# Altium PCB ISL6236A PCB.PcbDoc
Units mm, origin at the board's own origin, x right, y up, seen from the top; angles counter-clockwise.
Board outline 50 x 50 mm, 6 copper layers (L1 [Top Layer], L2 [GND], L3 [Int 1], L4 [Int 2], L5 [GND], L6 [Bottom Layer]), stack 0.215 mm thick; 41 components, 27 nets, 119 pads, 69 vias.
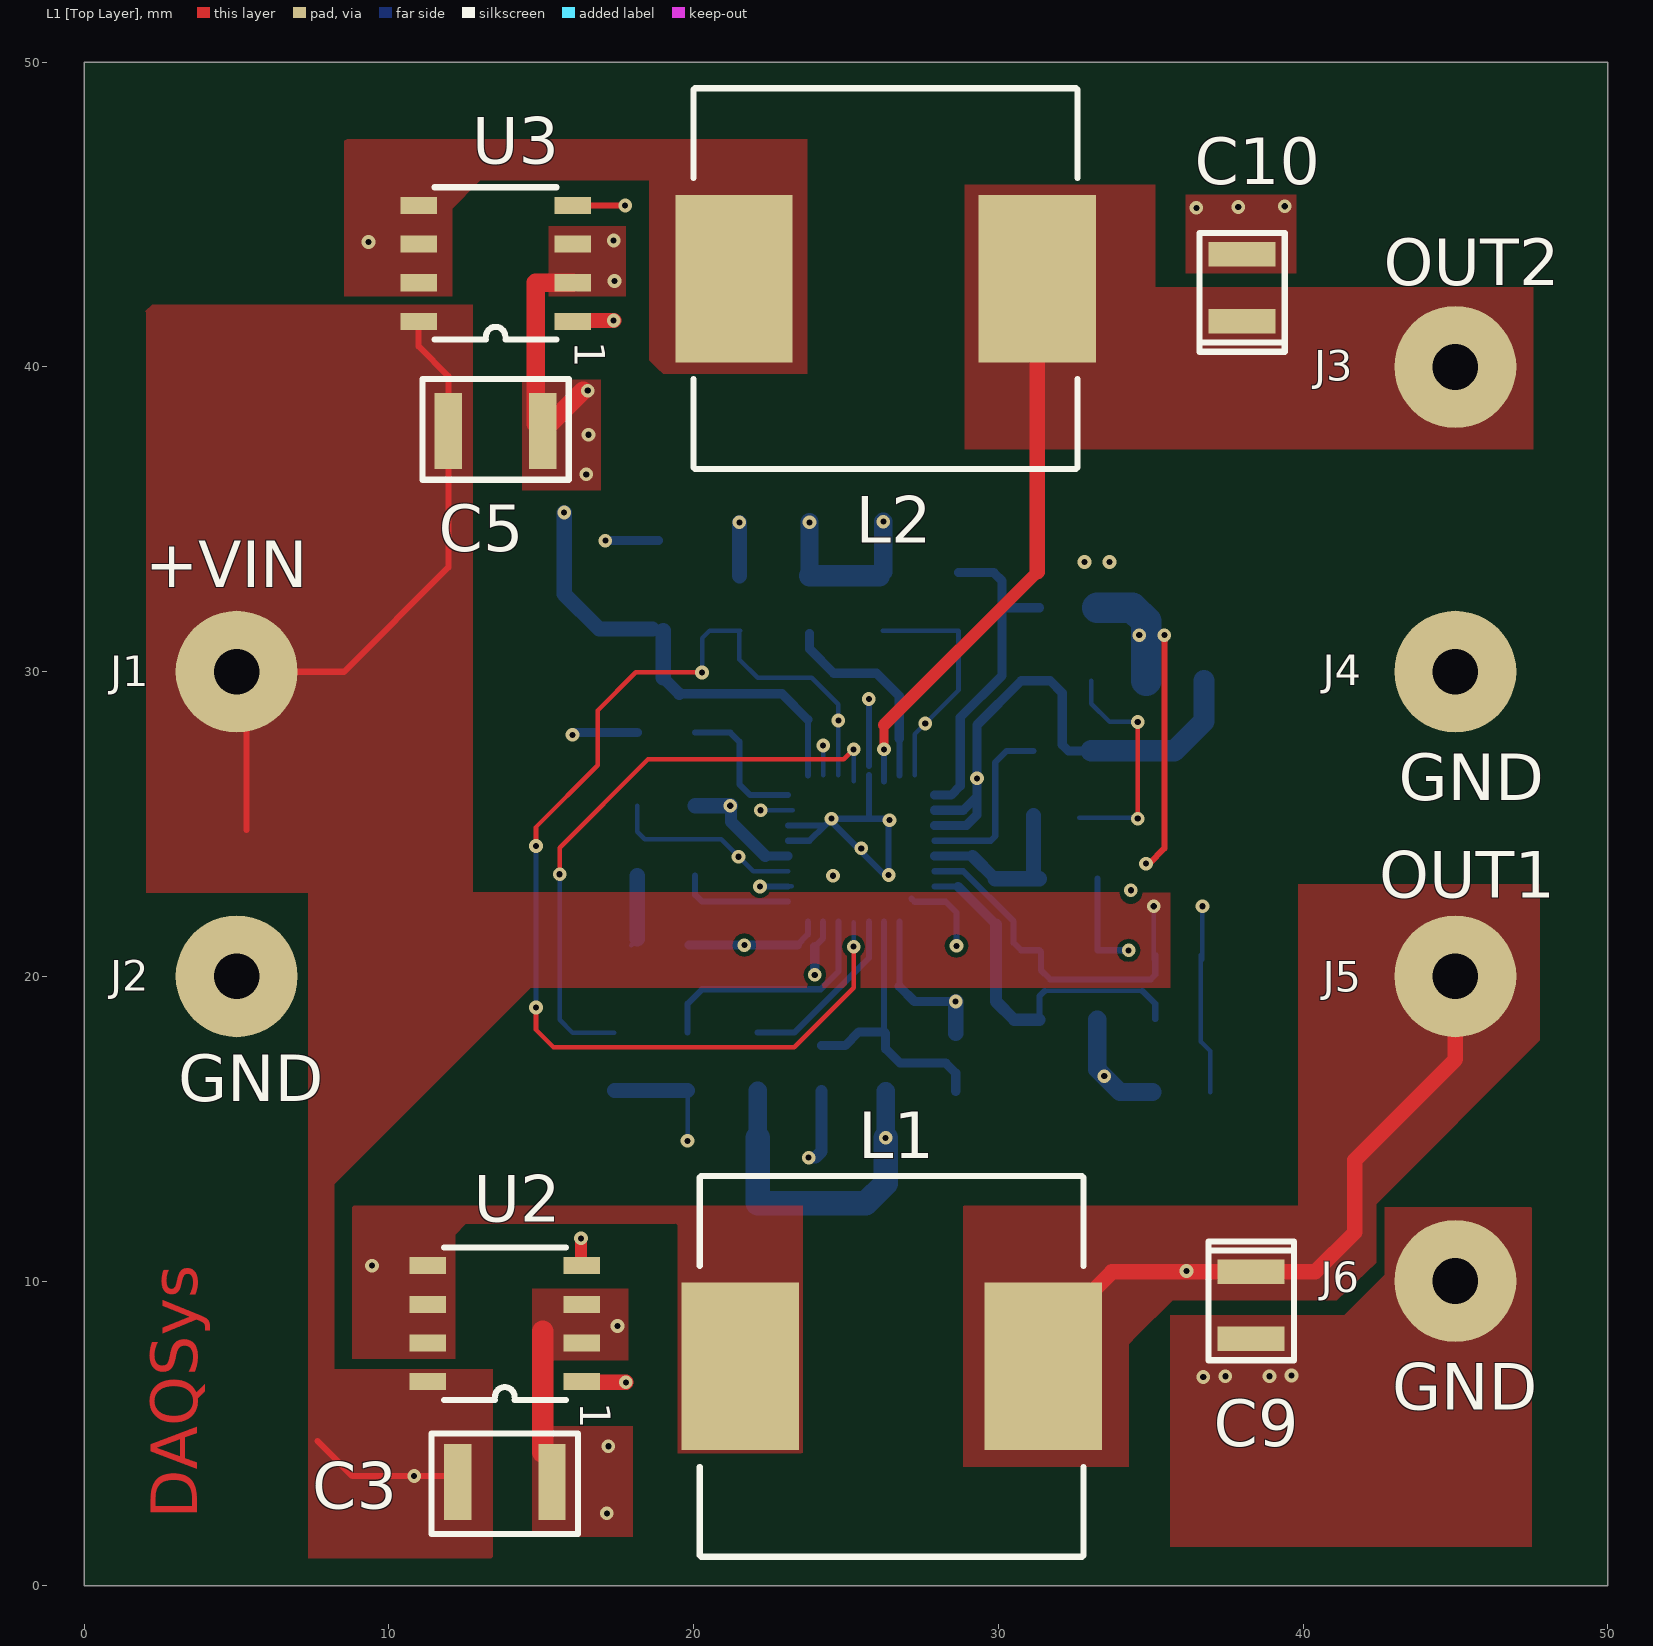
[diagram p0: L1 [Top Layer] view]
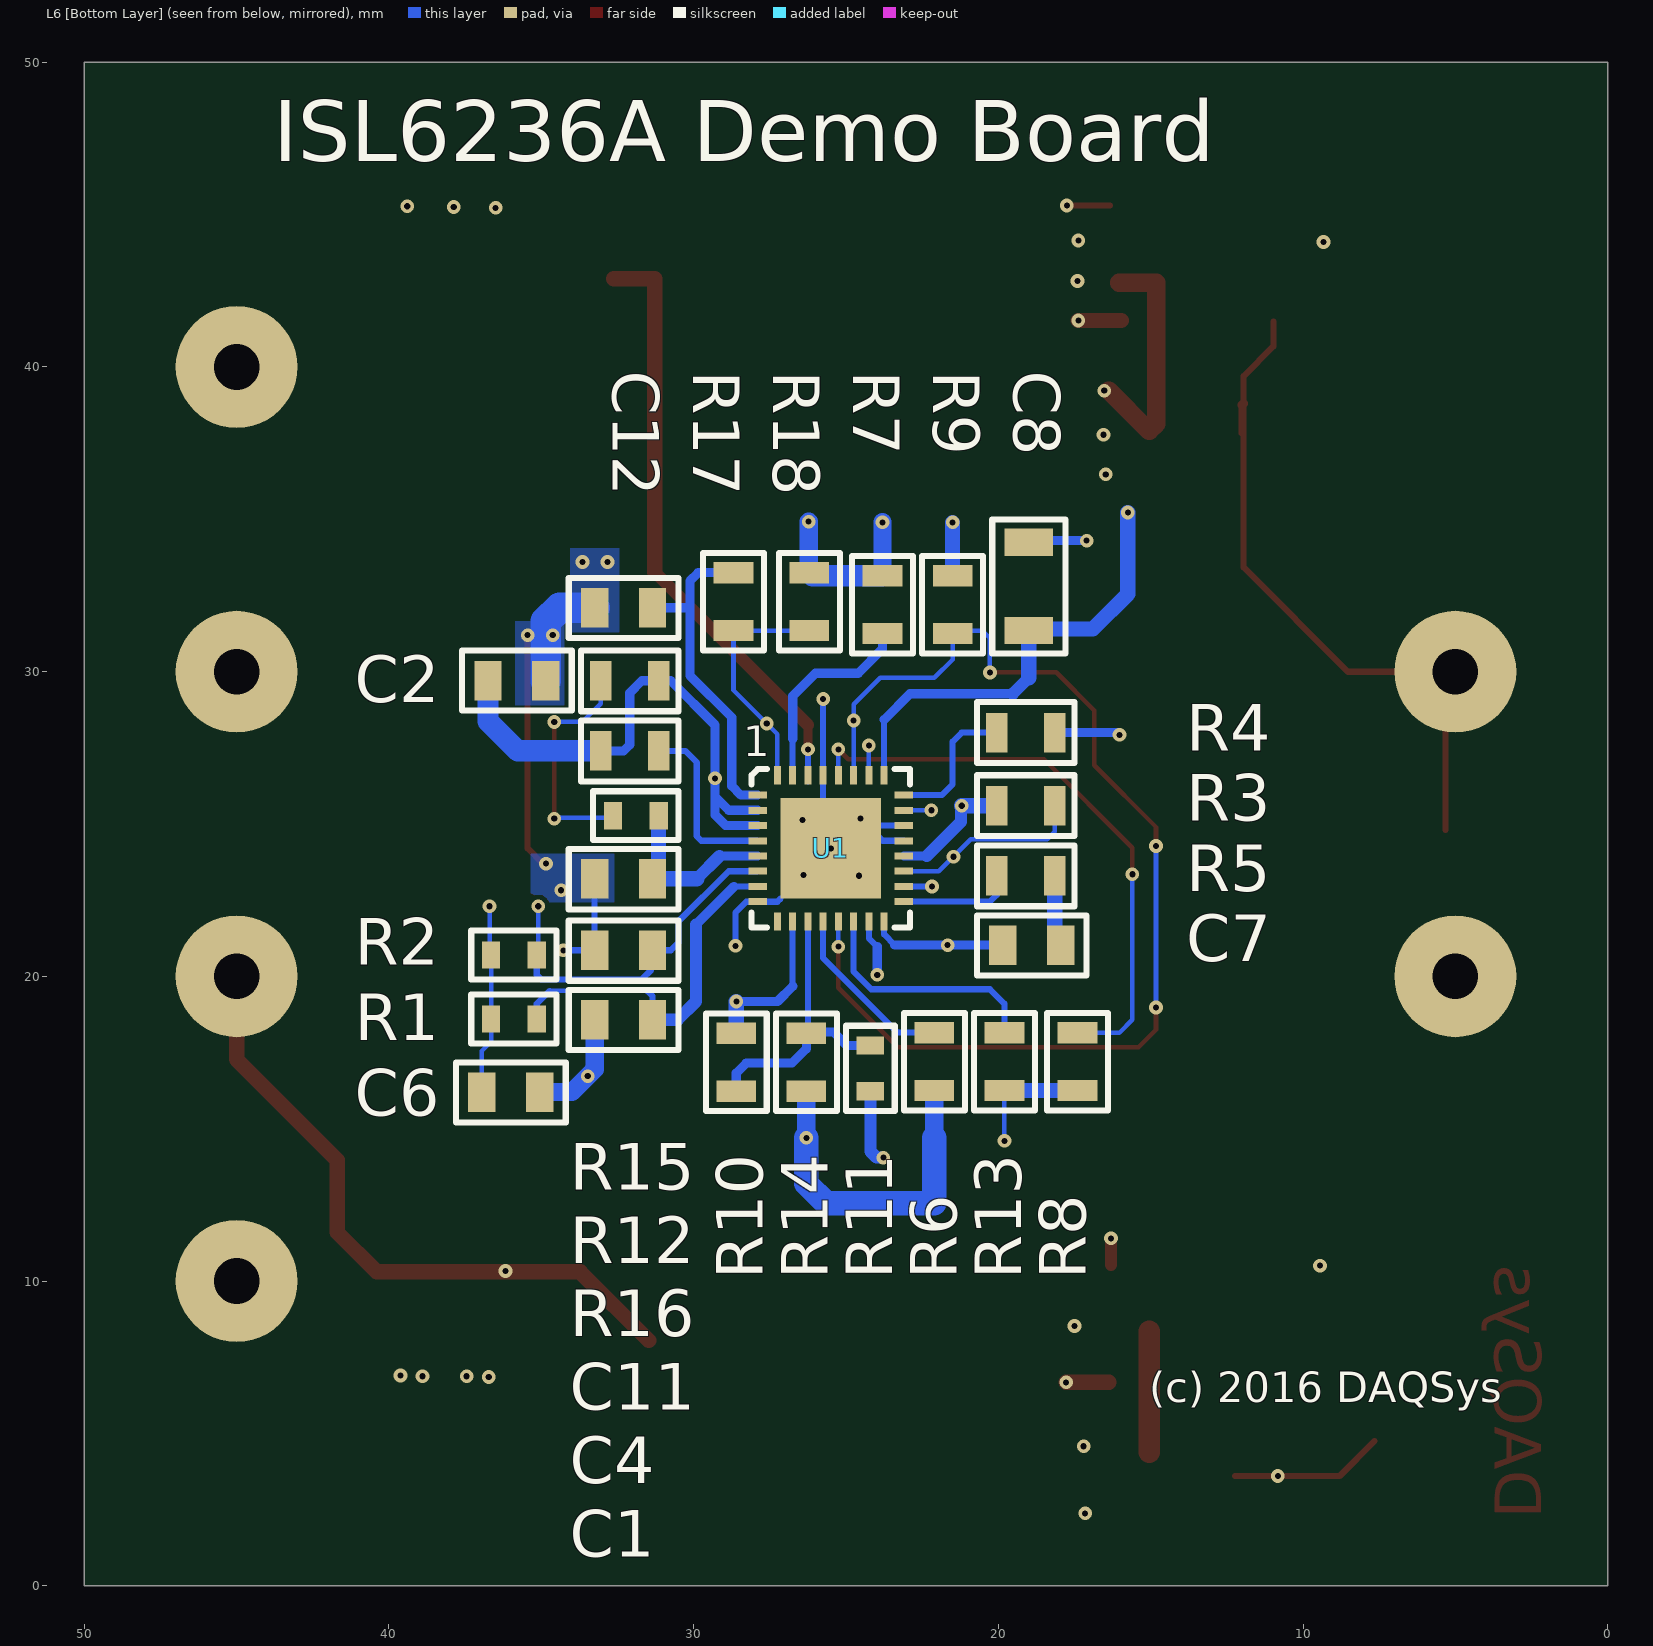
[diagram p1: L6 [Bottom Layer] view, seen from below]
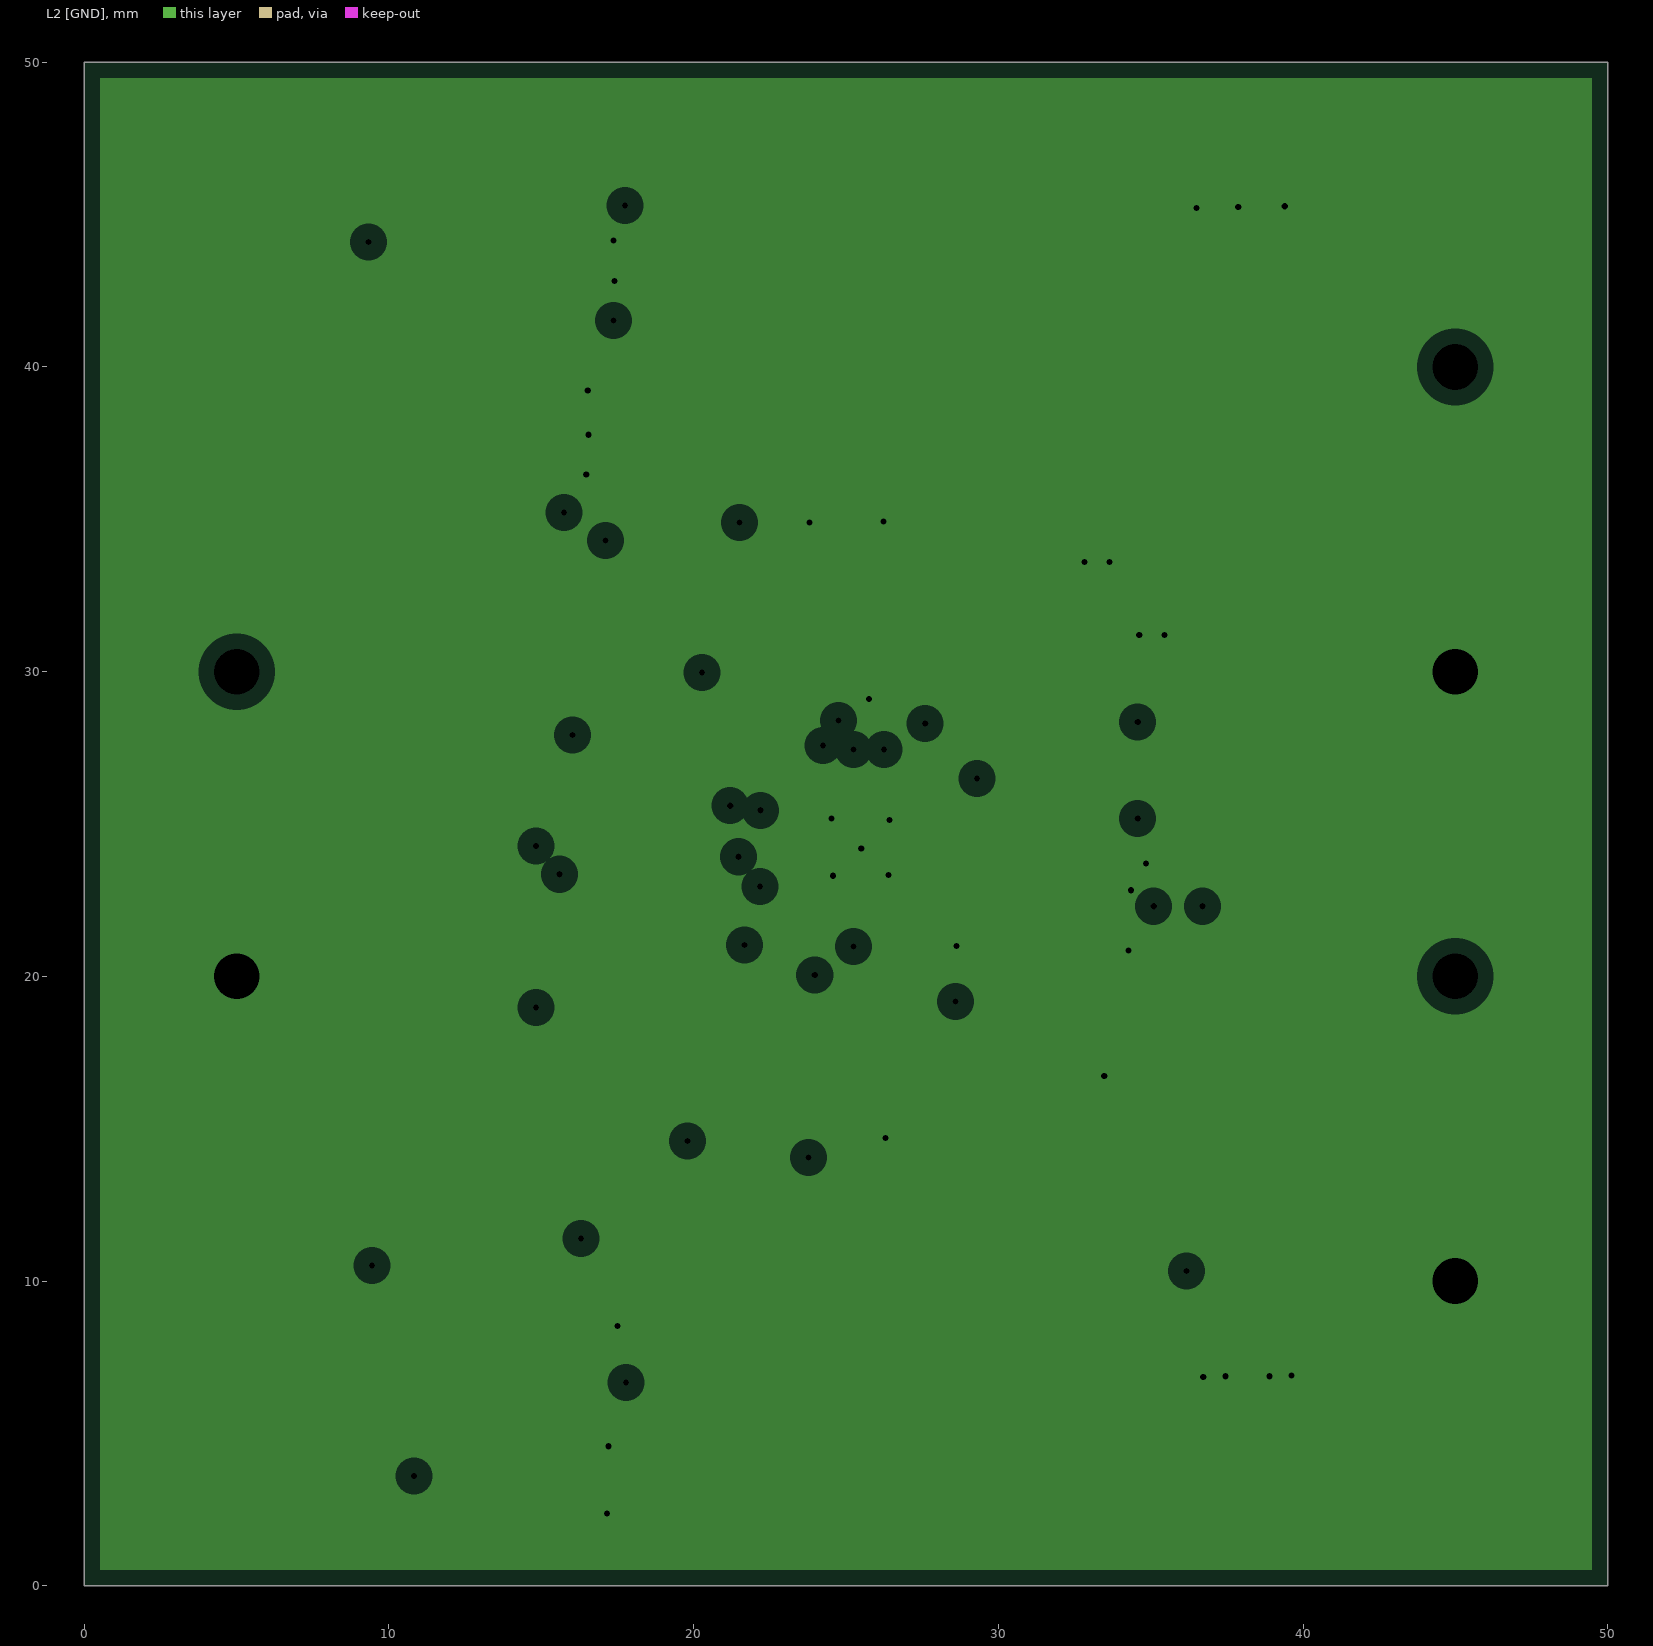
[diagram p2: L2 [GND], clearances drawn from the general rule]
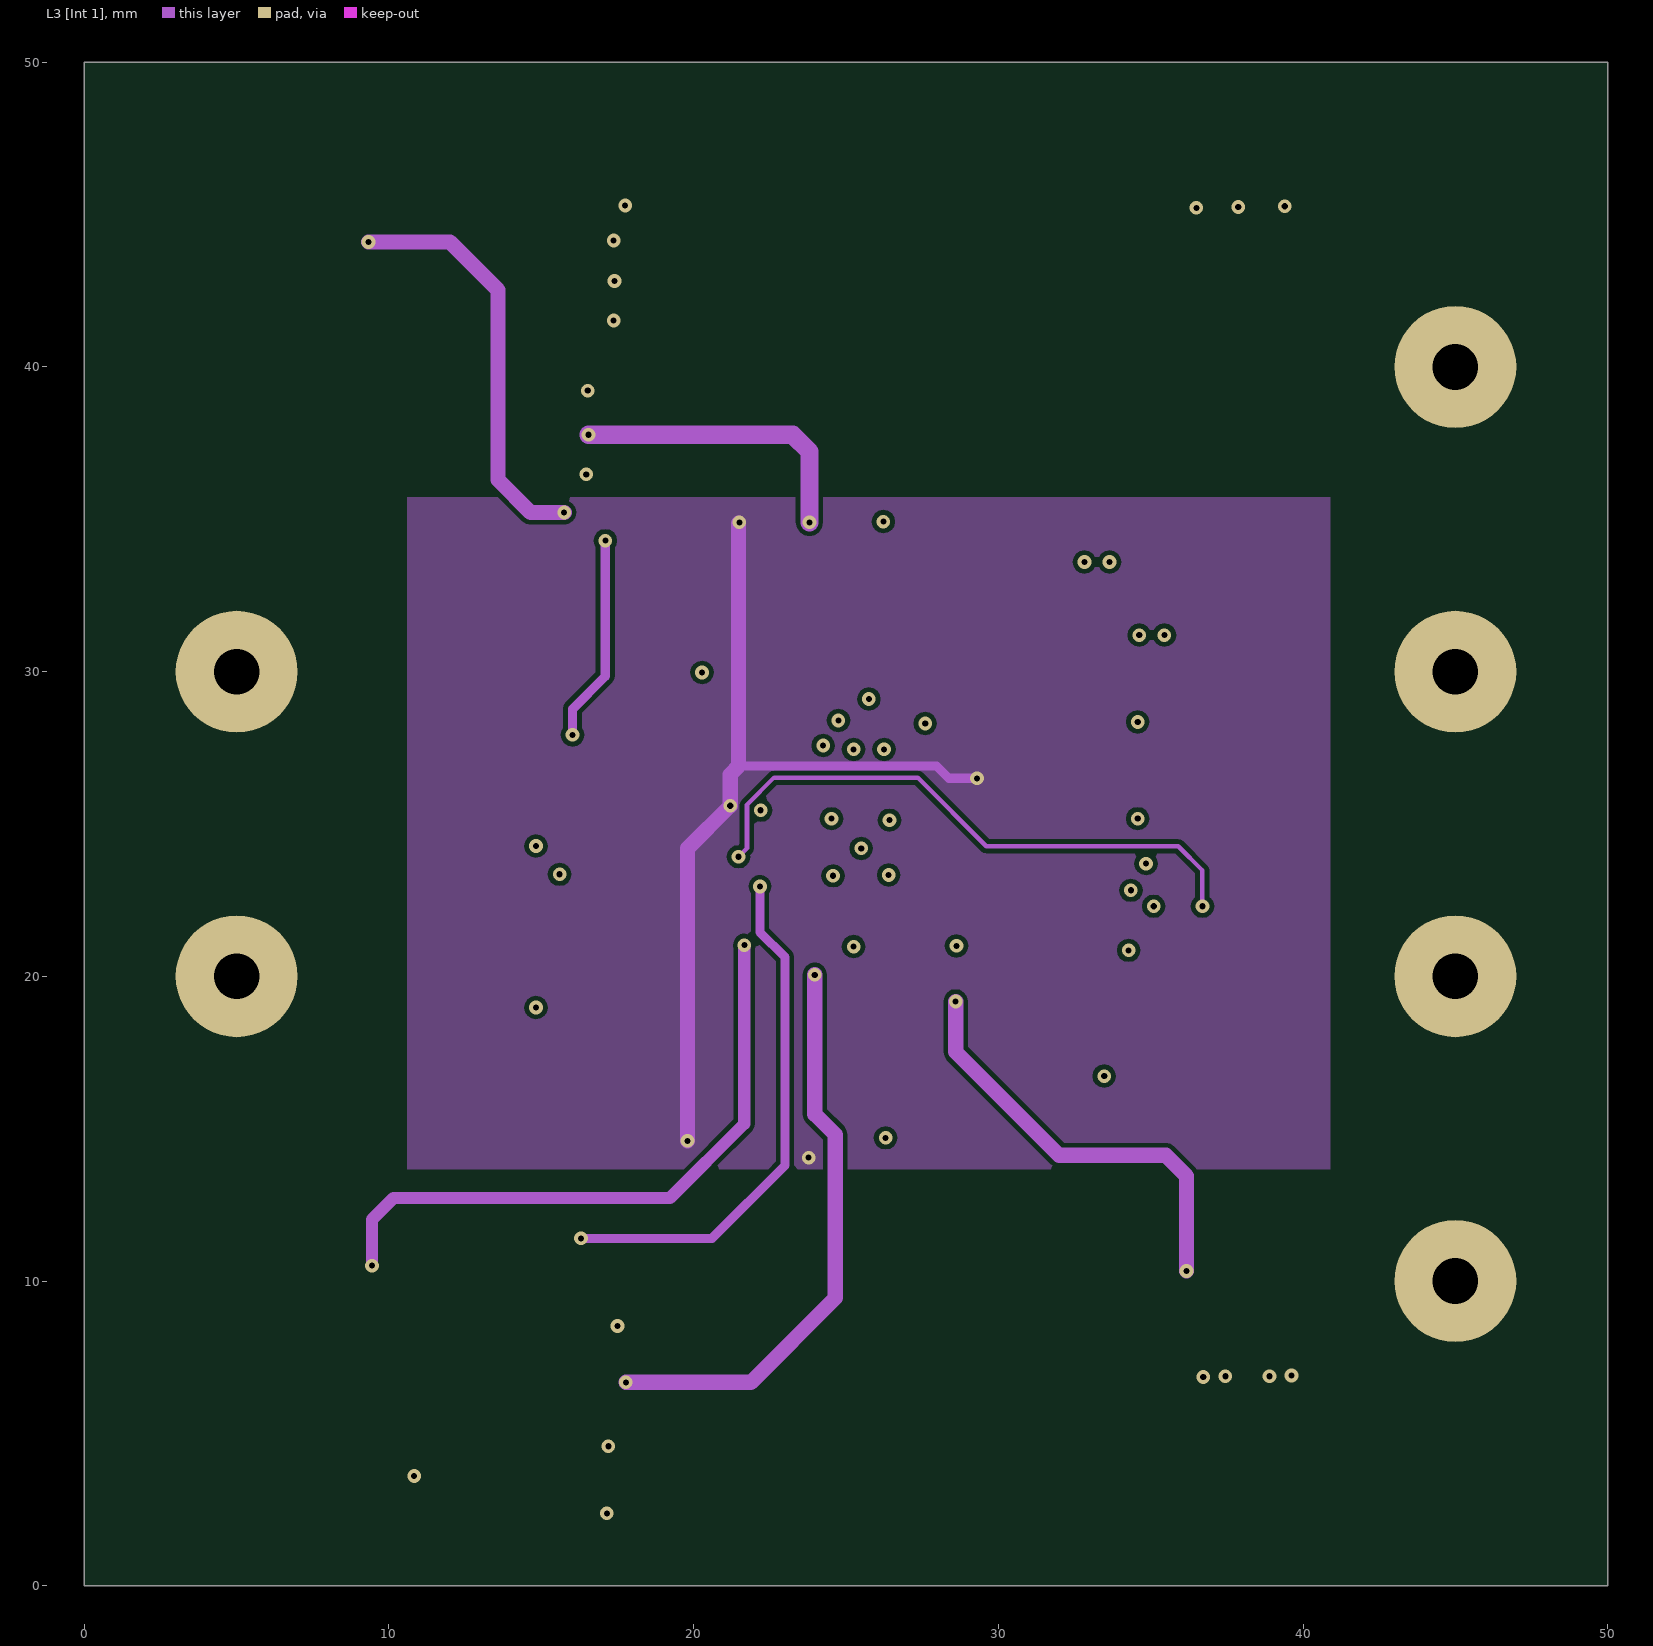
[diagram p3: L3 [Int 1]]
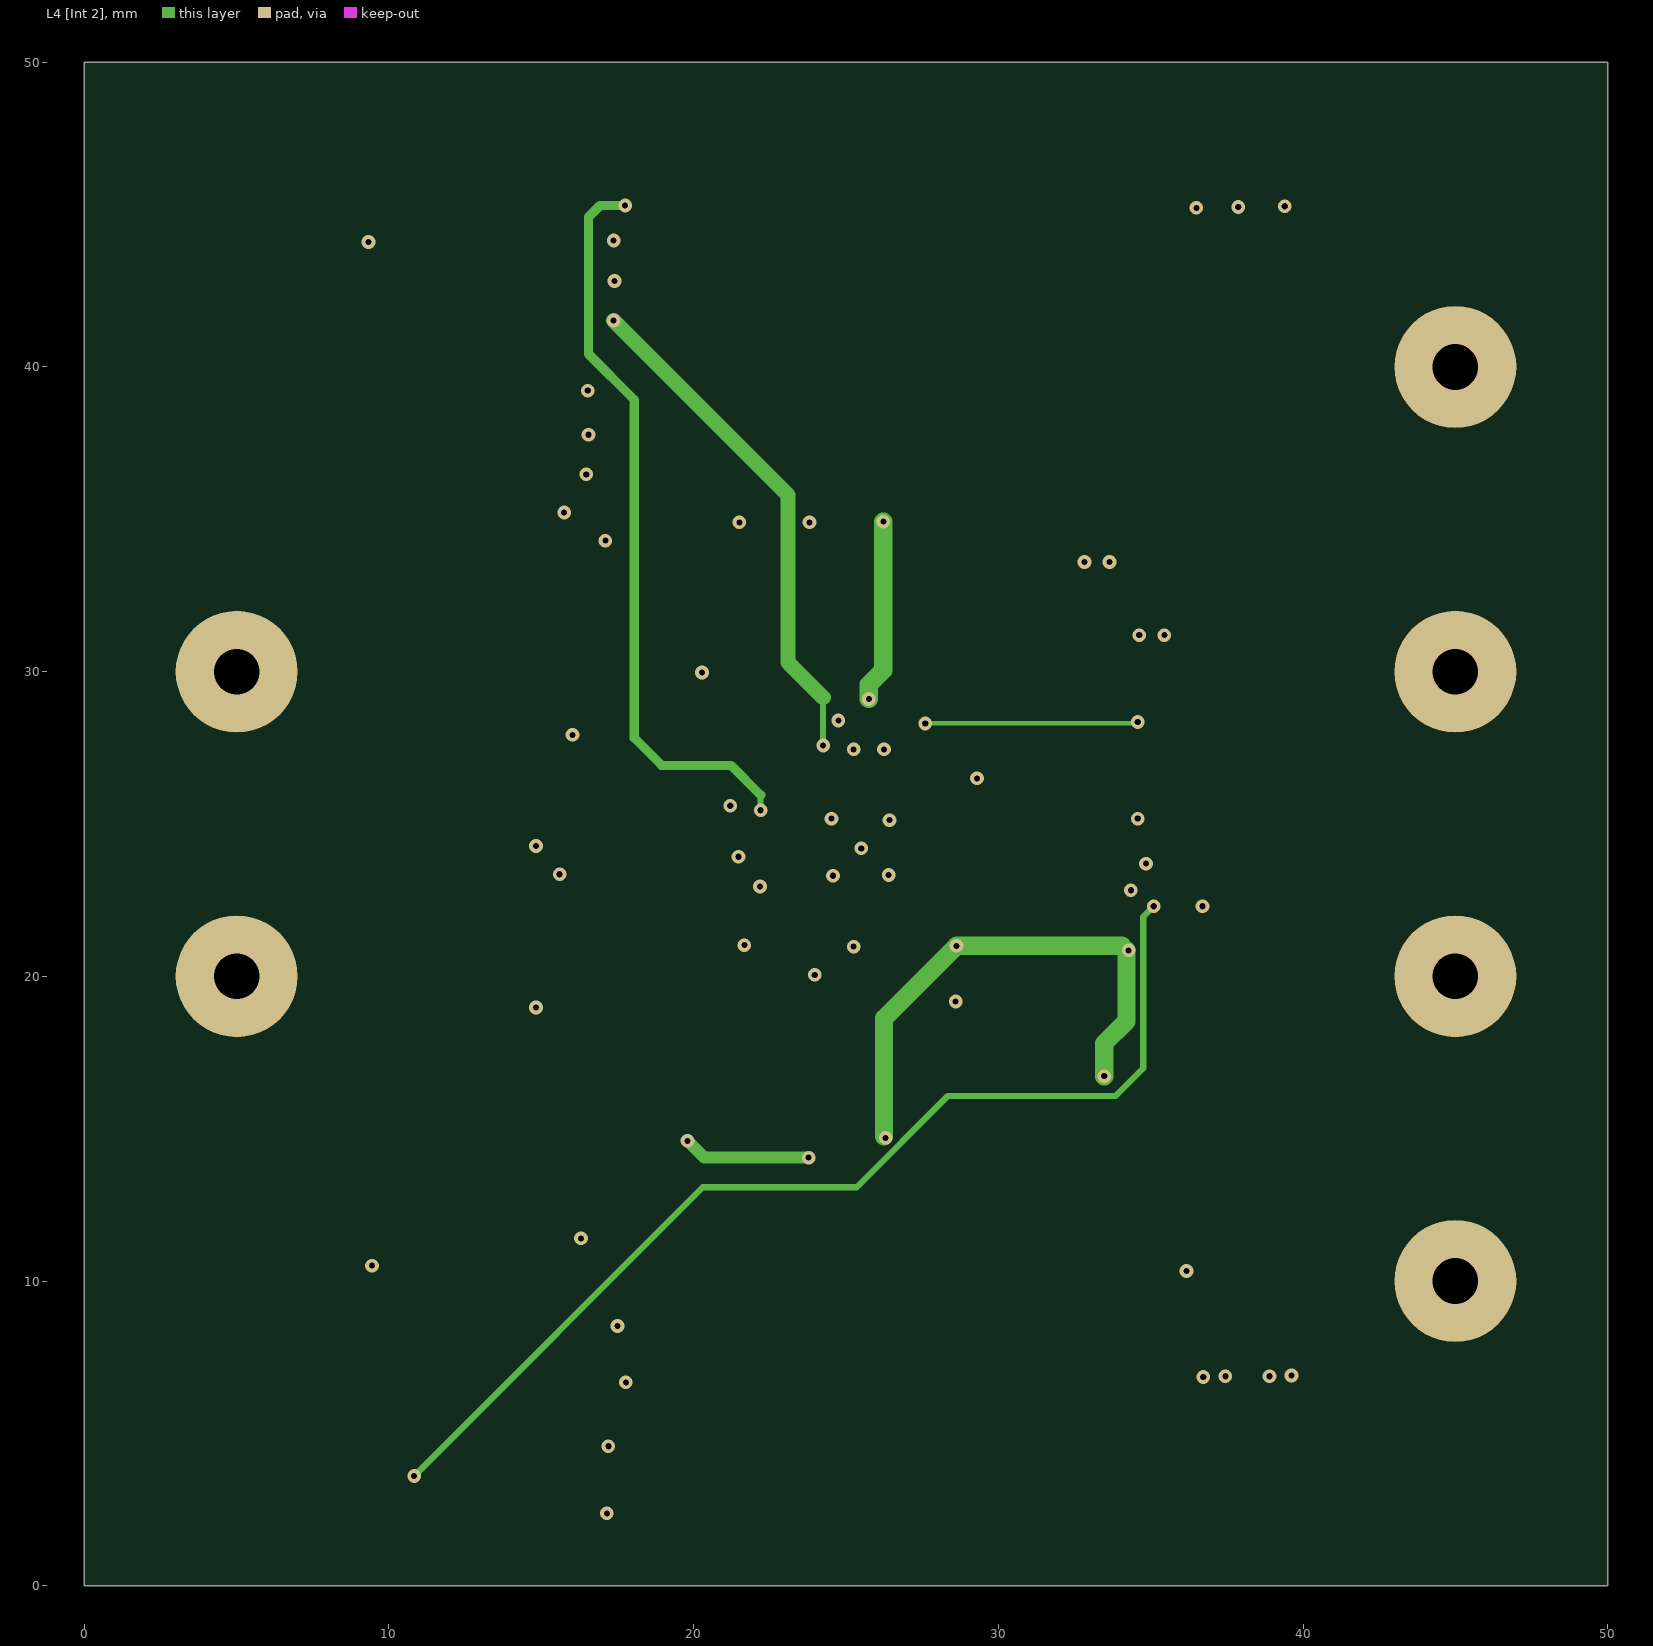
[diagram p4: L4 [Int 2]]
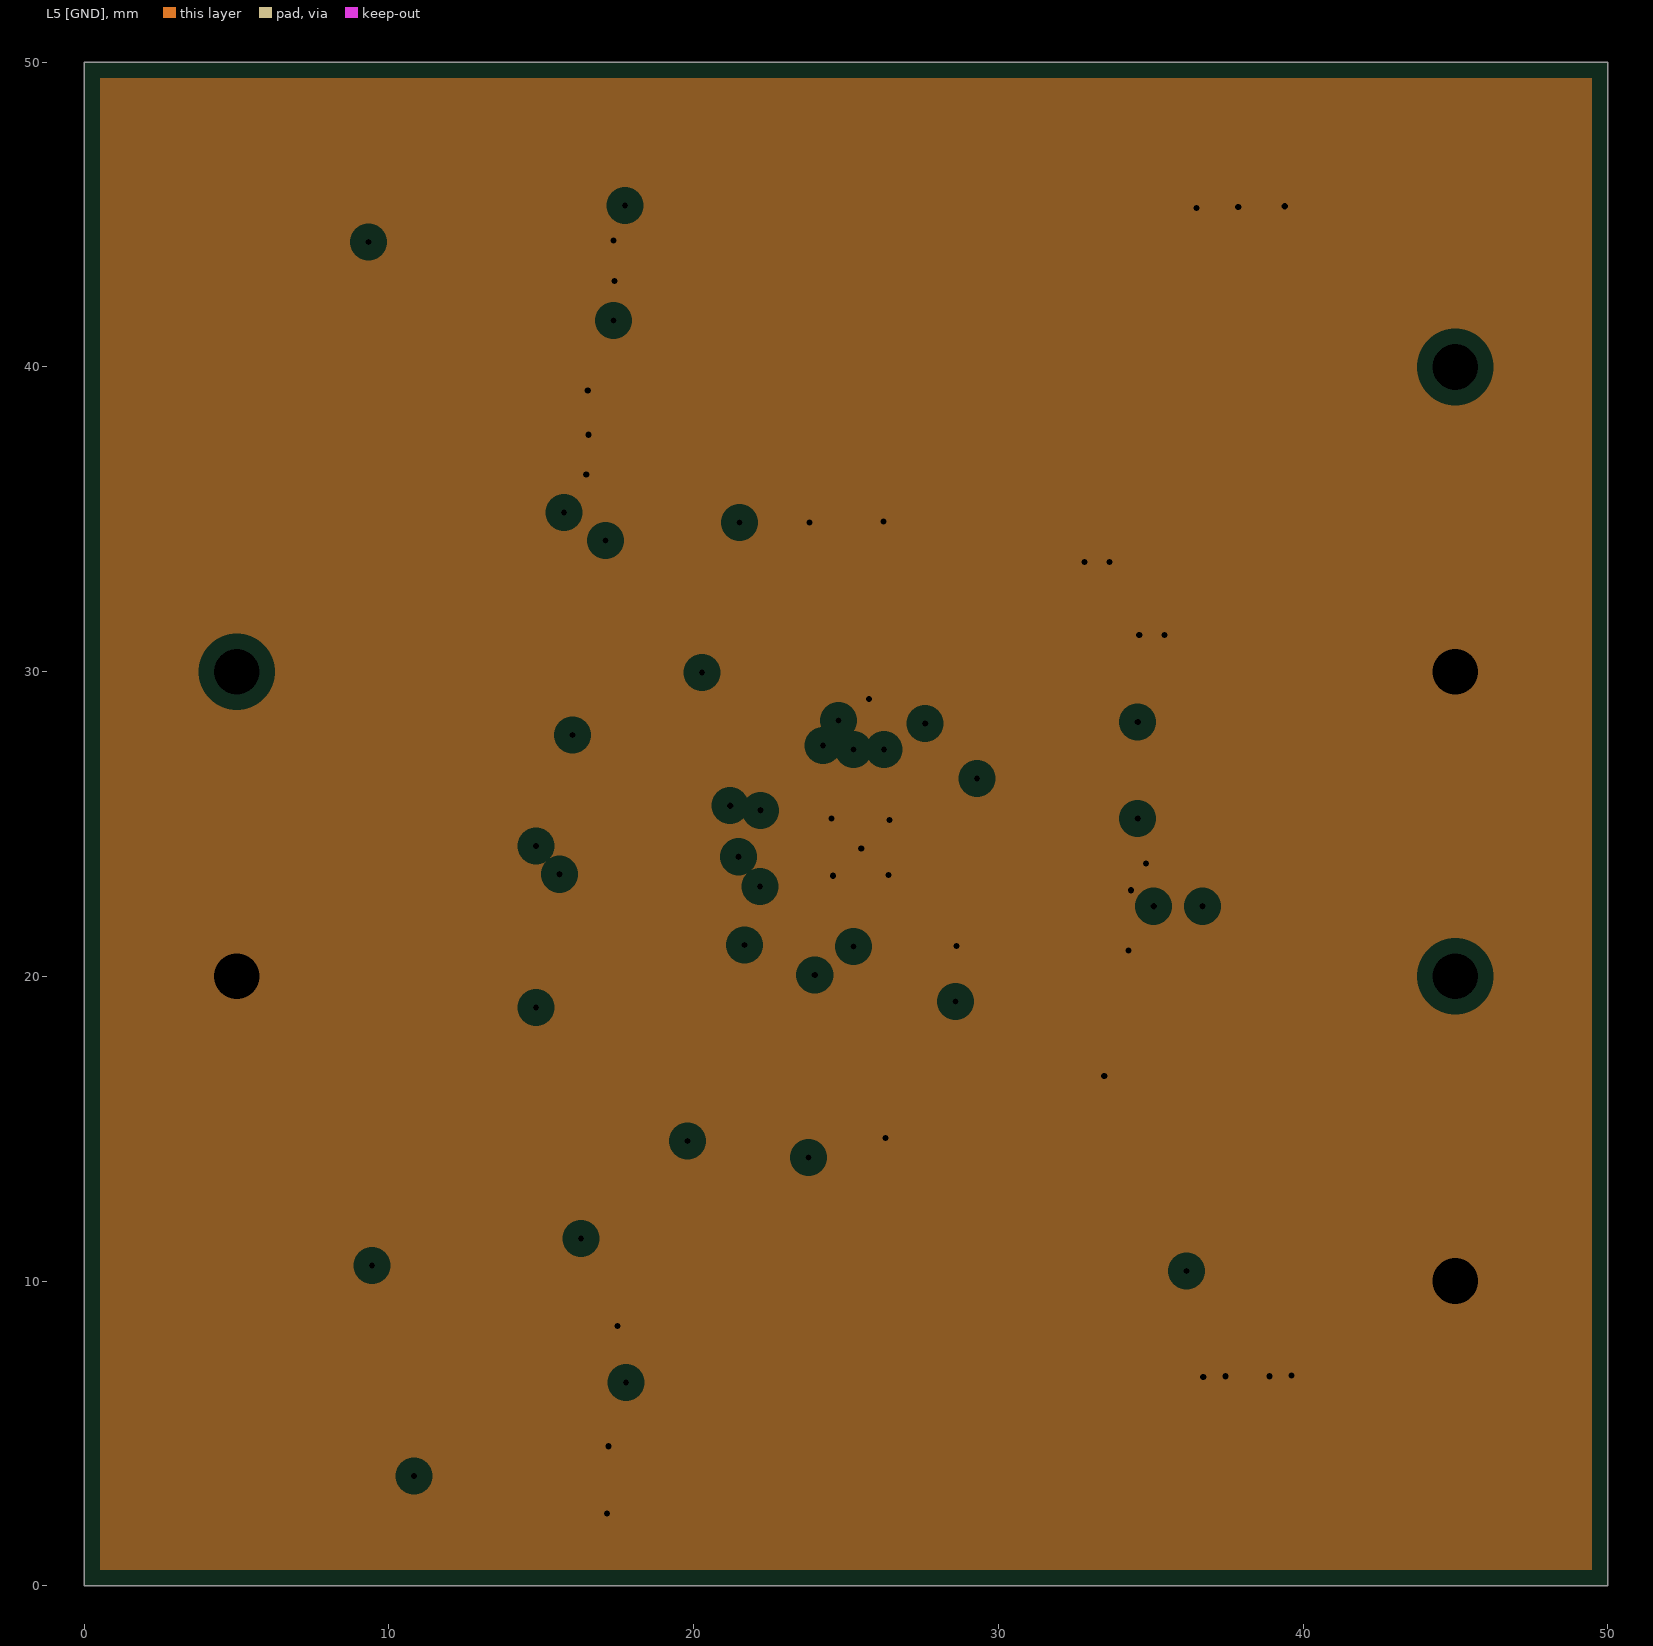
[diagram p5: L5 [GND], clearances drawn from the general rule]

## Layer stack, top to bottom
Top Solder: solder mask 0.0102, Solder Resist, Dk 3.5
L1 [Top Layer]: signal copper 0.0356
L2 [GND]: plane copper 0.036, net GND
L3 [Int 1]: signal copper 0.036
L4 [Int 2]: signal copper 0.036
L5 [GND]: plane copper 0.036, net GND
L6 [Bottom Layer]: signal copper 0.0356
Bottom Solder: solder mask 0.0102, Solder Resist, Dk 3.5

## Board outline
0,0 50,0 50,50 0,50 0,0

## Design rules (kind name [scope] priority, off if disabled: settings)
Clearance [All] p1: gap=0.15
ComponentClearance [All] p1: gap=0.1 collisioncheckmode=3 verticalgap=0.1 showdistances=FALSE
HoleSize [All] p1: absolutevalues=TRUE maxlimit=10 minlimit=0.025 maxpercent=80.000 minpercent=20.000
MinimumSolderMaskSliver [All] p1: minsoldermaskwidth=0.05
PlaneClearance [All] p1: clearance=0.508
PlaneConnect [All] p1: planeconnectstyle=Relief reliefexpansion=0.508 reliefentries=4 reliefconductorwidth=0.254 reliefairgap=0.254
PolygonConnect [All] p1: connectstyle=Direct reliefconductorwidth=0.254 reliefentries=4 polygonreliefangle="90 Angle" airgapwidth=0.254
RoutingVias [All] p1: holewidth=0.2 width=0.6 viastyle="Through Hole" minholewidth=0.1 minwidth=0.4 maxholewidth=10 maxwidth=10
SilkToSilkClearance [All] p1: silktosilkclearance=0.1
SilkToSolderMaskClearance [IsPad] p1: minsilkscreentomaskgap=0.1 clearancetoexposedcopper=TRUE
SolderMaskExpansion [All] p1: expansion=0.102
Width [All] p1: maxlimit=10 minlimit=0.15 preferedwidth=0.15
23 further rules are at their usual default settings.

## Components (designator, comment, footprint, x,y, rotation, side; value= is the part's Value field where it differs from the comment)
C1 "4.7uF" C0805 32.3,18.578 r0 bottom
C2 "1uF" C0805 35.8,29.7 r180 bottom
C3 "10uF" C1210 13.8,3.4 r180 top
C4 "1uF, 50V" C0805 32.3,20.854 r0 bottom
C5 "10uF" C1210 13.5,37.9 r0 top
C6 "1uF" C0805 36,16.2 r0 bottom
C7 "100nF" C0805 18.9,21.024 r0 bottom
C8 "220nF" C1206 19,32.8 r270 bottom
C9 "330uF, 2.5V" CPOL1210TCJ 38.3,9.2 r270 top
C10 "330uF, 2.5V" CPOL1210TCJ 38,42.6 r90 top
C11 "100nF" C0805 32.3,23.2 r0 bottom
C12 "100nF" C0805 32.3,32.1 r0 bottom
J1 "4MMX1.5MM" PAD_WITH_HOLE_4MMX1.5MM#1 4.2,32.7 r0 top
J2 "4MMX1.5MM" PAD_WITH_HOLE_4MMX1.5MM#2 4.4,12.6 r0 top
J3 "4MMX1.5MM" PAD_WITH_HOLE_4MMX1.5MM#3 45.8,40.7 r0 top
J4 "4MMX1.5MM" PAD_WITH_HOLE_4MMX1.5MM#4 45.9,31.4 r0 top
J5 "4MMX1.5MM" PAD_WITH_HOLE_4MMX1.5MM#5 45.9,16.6 r0 top
J6 "4MMX1.5MM" PAD_WITH_HOLE_4MMX1.5MM#6 46.1,7.8 r0 top
L1 "3u3 [DR125-3R3-R]" DR125 26.5,7.2 r180 top locked
L2 "2u2 [DR125-2R2-R]" DR125 26.3,42.9 r0 top locked
R1 "0R" R0603 35.9,18.6 r180 bottom
R2 "0R" R0603 35.9,20.7 r0 bottom
R3 "10R" R0805 19.1,25.6 r0 bottom
R4 "1R" R0805 19.1,28 r180 bottom
R5 "1R" R0805 19.1,23.3 r0 bottom
R6 "200k" R0805 22.099,17.2 r90 bottom
R7 "200k" R0805 23.801,32.2 r270 bottom
R8 "200k" R0805 17.4,17.2 r270 bottom
R9 "200k" R0805 21.5,32.2 r90 bottom
R10 "DNF" R0805 28.6,17.177 r270 bottom
R11 "0R" R0603 24.199,16.977 r270 bottom
R12 "10k" R0805 32.1,27.4 r0 bottom
R13 "10k" R0805 19.799,17.2 r270 bottom
R14 "DNF" R0805 26.3,17.177 r270 bottom
R15 "DNF" R0805 32.1,29.7 r0 bottom
R16 "0R" R0603 31.9,25.276 r180 bottom
R17 "DNF" R0805 28.693,32.3 r90 bottom
R18 "DNF" R0805 26.2,32.3 r90 bottom
U1 "ISL6236AIRZ-ND" L32.5x5B 25.5,24.2 r180 bottom
U2 "SI4816BDY-T1-E3" SO-8 13.8,8.6 r180 top
U3 "SI4816BDY-T1-E3" SO-8 13.5,43.4 r180 top

## Footprints (in the part's own frame and the unit in brackets; to place one, negate y for a bottom-side part, rotate by r counter-clockwise, add the part's x,y. Pads: shape width x height; smd on the part's side, far side on the other; paste and mask are expansions set on the pad)
C0805 [mm]
  rect 0.9x1.3 smd: 1(-0.95,0) 2(0.95,0)
  silkscreen extent -1.8,-0.98 1.8,1
C1206 [mm]
  rect 0.9x1.6 smd: 1(-1.45,0) 2(1.45,0)
  silkscreen extent -2.2,-1.2 2.2,1.2
C1210 [mm]
  rect 0.9x2.5 smd: 1(-1.55,0) 2(1.55,0)
  silkscreen extent -2.4,-1.6 2.4,1.7
CPOL1210TCJ [mm]
  rect 0.8x2.2 smd: 1(-1.1,0) 2(1.1,0)
  silkscreen extent -2.1,-1.4 1.8,1.4
DR125 [mm]
  rect 3.85x5.5 smd: 1(-4.975,0) 2(4.975,0)
  silkscreen extent -6.3,-6.25 6.3,6.25
L32.5x5B [mm]
  rect 0.6x0.23 smd mask+0.051: 1(-2.4,1.75) 2(-2.4,1.25) 3(-2.4,0.75) 4(-2.4,0.25) 5(-2.4,-0.25) 6(-2.4,-0.75) 7(-2.4,-1.25) 8(-2.4,-1.75) 17(2.4,-1.75) 18(2.4,-1.25) 19(2.4,-0.75) 20(2.4,-0.25) 21(2.4,0.25) 22(2.4,0.75) 23(2.4,1.25) 24(2.4,1.75)
  rect 0.23x0.6 smd mask+0.051: 9(-1.75,-2.4) 10(-1.25,-2.4) 11(-0.75,-2.4) 12(-0.25,-2.4) 13(0.25,-2.4) 14(0.75,-2.4) 15(1.25,-2.4) 16(1.75,-2.4) 25(1.75,2.4) 26(1.25,2.4) 27(0.75,2.4) 28(0.25,2.4) 29(-0.25,2.4) 30(-0.75,2.4) 31(-1.25,2.4) 32(-1.75,2.4)
  rect 3.3x3.3 smd mask+0.051: 33(0,0)
  silkscreen extent -2.6,-2.6 2.6,2.6
PAD_WITH_HOLE_4MMX1.5MM#1 [mm]
  round 4 hole 1.5: 1(0.8,-2.7)
PAD_WITH_HOLE_4MMX1.5MM#2 [mm]
  round 4 hole 1.5: 1(0.6,7.4)
PAD_WITH_HOLE_4MMX1.5MM#3 [mm]
  round 4 hole 1.5: 1(-0.8,-0.7)
PAD_WITH_HOLE_4MMX1.5MM#4 [mm]
  round 4 hole 1.5: 1(-0.9,-1.4)
PAD_WITH_HOLE_4MMX1.5MM#5 [mm]
  round 4 hole 1.5: 1(-0.9,3.4)
PAD_WITH_HOLE_4MMX1.5MM#6 [mm]
  round 4 hole 1.5: 1(-1.1,2.2)
R0603 [mm]
  rect 0.6x0.9 smd: 1(-0.75,0) 2(0.75,0)
  silkscreen extent -1.4,-0.8 1.4,0.8
R0805 [mm]
  rect 0.7x1.3 smd: 1(-0.95,0) 2(0.95,0)
  silkscreen extent -1.6,-1 1.6,1
SO-8 [mm]
  rect 1.194x0.559 smd: 1(-2.527,1.905) 2(-2.527,0.635) 3(-2.527,-0.635) 4(-2.527,-1.905) 5(2.528,-1.905) 6(2.528,-0.635) 7(2.528,0.635) 8(2.528,1.905)
  silkscreen extent -2,-2.5 2,2.5

## Part data
C1: library part CC0805ZRY5V6BB475, "CAP CER 4.7UF 10V Y5V 0805"
C2 C6: library part 08053D105KAT2A, "CAP CER 1UF 25V X5R 0805"
C3 C5: library part 885012109013, "CAP CER 10UF 25V X5R 1210"
C4: library part GRM2195C1H103FA01D, "CAP CER 10000PF 50V NP0 0805"
C7 C11 C12: library part 08055C104KAT2A, "CAP CER 0.1UF 50V X7R 0805"
C8: library part CL31F224ZBCNNNC, "CAP CER 0.22UF 50V Y5V 1206"
C9 C10: library part TCJB337M002R0070, "CAP TANT POLY 330UF 2.5V 1210"
J1 J2 J3 J4 J5 J6: library part PAD_WITH_HOLE_4MMX1.5MM
L1: library part DR125-3R3-R, "FIXED IND 3.3UH 9.26A 6.3 MOHM"
L2: library part DR125-2R2-R, "FIXED IND 2.2UH 10.9A 4.5 MOHM"
R1 R2 R11 R16: library part RC0603JR-070RL, "RES SMD 0.0OHM JUMPER 1/10W 0603"
R3: library part ESR10EZPJ100, "RES SMD 10 OHM 5% 0.4W 0805"
R4 R5: library part RMCF0805FT1R00, "RES SMD 1 OHM 1% 1/8W 0805"
R6 R7 R8 R9: library part RC0805FR-07200KL, "RES SMD 200K OHM 1% 1/8W 0805"
R10 R14 R15 R17 R18: library part RES
R12 R13: library part RR1220P-103-D, "RES SMD 10K OHM 0.5% 1/10W 0805"
U1: library part ISL6236AIRZ, "IC MAIN PWR CTRLR QUAD 32-QFN"
U2 U3: "MOSFET 2N-CH 30V 5.8A 8-SOIC"

## Via types
v1: diameter 0.45, hole 0.2, L1 [Top Layer] to L6 [Bottom Layer], 69 vias

## Nets (pads, with @x,y where several pads share a name; then routed paths per layer and width w, separated by ;. In a path a pad name is that pad's centre, name@x,y a point inside that pad or via, vN(x,y) a via of type N, cw(c..) or ccw(c..) an arc to the next point about the centre after c; other vN are vias at no path point)
+5PVCC: C6.2 R1.1 R2.2 R3.1 U1.19 | length 32.3
  L3 [Int 1] w0.15: v1(21.475,23.925) 21.75,24.2 21.75,25.264 21.75,25.636 22.639,26.525 27.35,26.525 29.6,24.275 35.9,24.275 36.7,23.475 v1(36.7,22.3)
  L6 [Bottom Layer] w0.15: R3.1 18.15,24.75 18.4,24.5 20.9,24.5 21.95,23.45 U1.19 ; R2.2 R1.1 36.65,17.85 36.95,17.55 C6.2 ; R2.2@36.7,20.55 v1(36.7,22.3)
+5V_VCC: C2.1 R3.2 R8.2 R9.2 R11.2 R12.2 R13.2 R15.1 U1.2 U1.3 U1.20 | length 63.4
  L3 [Int 1] w0.15: v1@21.5,34.875 v1(21.5,34.9)
  L3 [Int 1] w0.3: 21.475,26.9 27.975,26.9 28.375,26.5 v1(29.3,26.5)
  L3 [Int 1] w0.5: v1(19.8,14.6) 19.8,24.201 v1(21.2,25.6) 21.2,26.625 21.475,26.9 v1@21.475,34.875
  L4 [Int 2] w0.4: v1(19.8,14.6) 20.35,14.05 v1(23.775,14.05)
  L6 [Bottom Layer] w0.15: v1(19.8,14.6) R13.2@19.8,16.35 ; v1(21.2,25.6) v1@21.225,25.575
  L6 [Bottom Layer] w0.3: 22.35,23.95 U1.20 ; U1.3 28.95,24.95 29.3,25.3 29.3,25.9 ; U1.2 28.85,25.45 29.3,25.9 ; R12.2 32.3,27.4 32.1,27.6 32.1,29.3 31.7,29.7 R15.1 30.75,29.7 29.3,28.25 v1(29.3,26.5) 29.3,25.9
  L6 [Bottom Layer] w0.4: v1@21.225,25.575 21.225,25.075 22.35,23.95 ; v1(23.775,14.05) 23.999,14.05 24.199,14.251 R11.2
  L6 [Bottom Layer] w0.5: R8.2 R13.2@19.8,16.25 ; R3.2 v1(21.2,25.6) ; R9.2 v1(21.5,34.9)
  L6 [Bottom Layer] w0.7: R12.2 35.775,27.4 36.75,28.375 C2.1
+REF: C12.1 R17.2 U1.1 | length 11.1
  L6 [Bottom Layer] w0.3: U1.1 28.45,25.95 28.75,26.25 28.75,28.5 30.125,29.875 30.125,32.075 ; R17.2 29.85,33.25 30.125,32.975 30.125,32.075 ; C12.1 30.15,32.1 30.125,32.075
+VIN: C3.2 C4.1 C5.1 J1.1 R2.1 U1.6 U2.8 U3.8 | length 75.1
  L1 [Top Layer] w0.203: 5.325,24.8 5.325,29.675 J1.1 8.525,30 11.95,33.425 C5.1 11.95,38.808 11.95,39.7 10.972,40.678 U3.8 ; 7.65,4.75 8.8,3.6 v1(10.825,3.6) C3.2@12.233,3.6 ; C5.1@12.008,37.825 C5.1@12.008,38.75
  L1 [Top Layer] w0.3: C5.1@11.95,38.808 C5.1@12.008,38.75
  L4 [Int 2] w0.203: v1(10.825,3.6) 20.3,13.075 25.35,13.075 28.348,16.073 33.847,16.073 34.756,16.982 34.756,21.956 v1(35.1,22.3)
  L6 [Bottom Layer] w0.15: R2.1@35.1,20.55 v1(35.1,22.3)
  L6 [Bottom Layer] w0.203: U1.6 28.85,23.45 30.5,21.8 30.5,21.1 30.746,20.854 C4.1 31.4,20.804 31.4,20.2 31.7,19.9 35,19.9 35.15,20.05 R2.1
+VREF3: C11.1 R16.2 U1.5 | length 5.9
  L6 [Bottom Layer] w0.3: U1.5 29.15,23.95 ; C11.1@31.15,23.4 C11.1
  L6 [Bottom Layer] w0.4: 29.15,23.95 29.9,23.2
  L6 [Bottom Layer] w0.5: 29.9,23.2 C11.1 ; C11.1@31.15,23.4 R16.2
EN1: R13.1 U1.14 | length 8
  L6 [Bottom Layer] w0.2: R13.1 19.799,19.099 20.275,19.575 24.172,19.575 24.75,20.153 U1.14
EN_LDO: R12.1 U1.4 | length 5.9
  L6 [Bottom Layer] w0.2: U1.4 29.75,24.45 29.9,24.6 29.9,27.025 30.275,27.4 R12.1
FB1: R10.2 R11.1 R14.1 U1.11 | length 9.7
  L6 [Bottom Layer] w0.2: R14.1@26.25,18.177 U1.11
  L6 [Bottom Layer] w0.3: R11.1 24.973,17.727 25.422,18.177 26.25,18.177 R14.1 26.3,17.625 26.775,17.15 28.275,17.15 28.6,16.825 R10.2
GND: C1.2 C2.2 C3.1 C4.2 C5.2 C6.1 C9.2 C10.2 C11.2 C12.2 J2.1 J4.1 J6.1 R6.1 R7.1 R14.2 R18.2 U1.8 U1.21 U1.22 U1.29 U1.33 U2.2 U2.3 U3.2 U3.3 | length 97.8
  L1 [Top Layer] w0.203: v1(34.85,23.7) 34.95,23.7 35.45,24.2 v1(35.45,31.2)
  L1 [Top Layer] w0.6: U3.2 14.815,42.765 14.815,38.135 C5.2 v1@16.375,39.225
  L1 [Top Layer] w0.7: C3.1@15.05,4.375 15.05,8.35
  L3 [Int 1] w0.6: v1(16.55,37.775) 23.25,37.775 23.8,37.225 v1(23.8,34.9)
  L4 [Int 2] w0.6: v1(25.75,29.1) 25.75,29.575 26.225,30.05 v1(26.225,34.925) ; v1@26.247,14.753 26.247,18.622 v1(28.625,21) 34.058,21 ; v1(33.475,16.725) 33.475,17.796 34.204,18.525 v1@34.204,20.854
  L6 [Bottom Layer] w0.15: v1@26.2,34.95 v1(26.225,34.925)
  L6 [Bottom Layer] w0.2: 25.75,26.9 v1(25.75,29.1)
  L6 [Bottom Layer] w0.203: U1.21 23.8,24.45 U1.33@24.3,24.95 ; U1.22 U1.33@24.3,24.95 ; U1.29 U1.33@25.75,25.175 ; 27.15,22.55 27.25,22.45 U1.8 28.275,22.45 28.625,22.1 v1(28.625,21) ; C11.2 C4.2 v1(34.279,20.854) ; J4.1@43.875,31.125 J4.1 ; U1.33@24.3,24.95 U1.33@24.475,25.125 ; U1.33@24.475,25.125 v1(24.525,25.175) U1.33@25.75,25.175 ; U1.33@24.475,25.125 26.275,23.325 v1(26.4,23.325) 26.4,25.1 v1(26.425,25.125) 26.375,25.175 U1.33@25.75,25.175
  L6 [Bottom Layer] w0.6: 22.1,14.7 R6.1 ; R7.1@23.8,33.15 v1(23.8,34.9) ; R18.2@26.225,33.275 v1(26.225,34.925) ; v1(26.3,14.7) R14.2@26.3,16.227 ; C1.2 33.25,16.95 v1(33.475,16.725) 34,16.2 C6.1
  L6 [Bottom Layer] w0.7: R7.1 R18.2@26.1,33.15
  L6 [Bottom Layer] w0.8: 22.1,14.7 22.1,12.55 25.65,12.55 26.3,13.2 v1(26.3,14.7)
  L6 [Bottom Layer] w1: C12.2 34.4,32.1 34.85,31.65 34.85,31.125 C2.2
  other v1: 17.15,2.375 17.2,4.575 36.725,6.85 37.45,6.875 38.9,6.875 39.625,6.9 17.5,8.525 34.35,22.825 24.575,23.3 25.5,24.2 34.625,31.2 32.825,33.6 33.65,33.6 16.475,36.475 16.525,39.225 17.4,42.825 17.375,44.15 36.5,45.225 37.875,45.25 39.4,45.275
LDO_VCC: C1.1 R1.2 U1.7 | length 12.1
  L6 [Bottom Layer] w0.15: 31.525,19.525 34.725,19.525
  L6 [Bottom Layer] w0.2: U1.7 28.675,22.95 ; C1.1 31.35,19.35 31.525,19.525 ; 34.725,19.525 35.15,19.1 R1.2
  L6 [Bottom Layer] w0.3: 28.675,22.95 29.925,21.7
  L6 [Bottom Layer] w0.4: 29.925,21.7 29.925,19.175 30.522,18.578 C1.1
LGATE1: U1.18 U2.4 | length 19.1
  L1 [Top Layer] w0.15: U2.4@16.3,10.532 U2.4
  L1 [Top Layer] w0.4: U2.4@16.3,10.532 v1(16.3,11.4)
  L3 [Int 1] w0.3: v1(16.3,11.4) 20.6,11.4 23,13.8 23,20.625 22.175,21.45 v1(22.175,22.95)
  L6 [Bottom Layer] w0.15: U1.18 U1.18@23.225,22.95
  L6 [Bottom Layer] w0.2: v1(22.175,22.95) U1.18
LGATE2: U1.23 U3.4 | length 27
  L1 [Top Layer] w0.203: U3.4@16.342,45.3 v1(17.75,45.3)
  L4 [Int 2] w0.2: v1(22.2,25.45) 22.2,25.95
  L4 [Int 2] w0.3: v1(17.75,45.3) 16.925,45.3 16.55,44.925 16.55,40.425 18.05,38.925 18.05,27.825 18.95,26.925 21.225,26.925 22.2,25.95
  L6 [Bottom Layer] w0.15: v1(22.2,25.45) U1.23@23.25,25.45
NetC7_1: C7.1 R5.1 | length 2.4
  L6 [Bottom Layer] w0.15: C7.1 C7.1@18.15,21.224
  L6 [Bottom Layer] w0.5: C7.1@18.15,21.224 R5.1
NetC8_1: C8.1 R4.2 | length 10.7
  L3 [Int 1] w0.3: v1(16.025,27.925) 16.025,28.775 17.1,29.85 v1(17.1,34.3)
  L6 [Bottom Layer] w0.15: v1(16.025,27.925) v1@16.1,28
  L6 [Bottom Layer] w0.3: v1@16.1,28 R4.2 ; v1@17.1,34.3 C8.1@18.85,34.3
NetR4_1: R4.1 U1.24 | length 4.7
  L6 [Bottom Layer] w0.2: R4.1 21.2,28 21.5,27.7 21.5,26.3 21.85,25.95 U1.24
NetR5_2: R5.2 U1.17 | length 3.8
  L6 [Bottom Layer] w0.2: R5.2 20.05,22.675 20.275,22.45 U1.17
NetR6_2: R6.2 U1.12 | length 5.9
  L6 [Bottom Layer] w0.2: R6.2 23.3,18.15 25.75,20.6 U1.12
NetR7_2: R7.2 U1.31 | length 6.7
  L6 [Bottom Layer] w0.2: U1.31 26.75,27.8
  L6 [Bottom Layer] w0.3: R7.2 23.801,30.749 24.6,29.95 26,29.95 26.75,29.2 26.75,27.8
OUT1: C9.1 J5.1 L1.1 R10.1 U1.10 | length 40.7
  L1 [Top Layer] w0.5: L1.1@31.475,8.05 33.725,10.3 C9.1 40.4,10.3 41.7,11.6 41.7,13.975 45,17.275 J5.1
  L3 [Int 1] w0.5: v1(28.6,19.175) 28.6,17.525 32,14.125 35.5,14.125 36.175,13.45 v1(36.175,10.325)
  L6 [Bottom Layer] w0.2: 26.75,19.675 U1.10
  L6 [Bottom Layer] w0.3: 26.75,19.675 27.25,19.175 v1(28.6,19.175)
  L6 [Bottom Layer] w0.5: R10.1 v1(28.6,19.175)
OUT2: C10.1 J3.1 L2.2 U1.30 | length 19.9
  L1 [Top Layer] w0.3: v1(26.25,27.45) 26.25,28.25
  L1 [Top Layer] w0.4: 26.25,28.25 31.275,33.275
  L1 [Top Layer] w0.5: 31.275,33.275 L2.2 L2.2@32.625,42.9
  L6 [Bottom Layer] w0.2: U1.30@26.25,26.4 v1(26.25,27.45)
PHASE1: C7.2 L1.2 U1.16 U2.5 U2.6 U2.7 | length 25.4
  L3 [Int 1] w0.4: v1(9.445,10.505) 9.445,12.02 10.15,12.725 19.225,12.725 21.663,15.163 v1(21.663,21.024)
  L6 [Bottom Layer] w0.2: 23.399,21.024 23.75,21.375 U1.16
  L6 [Bottom Layer] w0.3: C7.2 v1(21.663,21.024) 23.399,21.024
PHASE2: C8.2 L2.1 U1.25 U3.5 U3.6 U3.7 | length 28.5
  L3 [Int 1] w0.5: v1(9.325,44.1) 12,44.1 13.575,42.525 13.575,36.3 14.65,35.225 v1(15.75,35.225)
  L6 [Bottom Layer] w0.2: U1.25 23.75,28.425
  L6 [Bottom Layer] w0.3: 19.525,29.275 22.9,29.275 23.75,28.425
  L6 [Bottom Layer] w0.4: 19,29.8 19.525,29.275
  L6 [Bottom Layer] w0.5: v1(15.75,35.225) 15.75,32.55 16.9,31.4 C8.2@18.65,31.4 ; 19,29.8 C8.2
POK1: R9.1 U1.13 U1.27 | length 38.4
  L1 [Top Layer] w0.15: v1(14.825,18.975) 14.825,18.25 15.4,17.675 23.3,17.675 25.25,19.625 v1(25.25,20.975) ; v1(14.825,24.275) 14.825,24.9 16.85,26.925 16.85,28.725 18.1,29.975 v1(20.275,29.975)
  L6 [Bottom Layer] w0.15: v1(14.825,18.975) v1(14.825,24.275) ; v1(20.275,29.975) 20.275,31.1 20.525,31.35 R9.1@21.525,31.35 ; R9.1 21.5,30.4 22.1,29.8 23.875,29.8 24.75,28.925 v1(24.75,28.4) U1.27 ; v1(25.25,20.975) U1.13@25.25,21.775
POK2: R8.1 U1.28 | length 19.7
  L1 [Top Layer] w0.15: v1(15.6,23.35) 15.6,24.225 18.5,27.125 24.925,27.125 v1(25.25,27.45)
  L6 [Bottom Layer] w0.15: v1(15.6,23.35) 15.6,18.575 16.025,18.15 R8.1 ; U1.28@25.25,26.4 v1(25.25,27.45)
REFIN2: R15.2 R16.1 R17.1 R18.1 U1.32 | length 22.4
  L1 [Top Layer] w0.15: v1(34.575,25.175) v1(34.575,28.35)
  L4 [Int 2] w0.15: v1(27.6,28.3) v1@34.525,28.3
  L6 [Bottom Layer] w0.15: R18.1 R17.1 28.693,29.393 27.25,27.95 U1.32 ; R16.1@32.65,25.2 34.55,25.2 v1(34.575,25.175) ; R15.2 33.05,28.95 33.65,28.35 v1(34.575,28.35)
UGATE1: U1.15 U2.1 | length 22.2
  L1 [Top Layer] w0.5: U2.1@16.367,6.675 v1(17.775,6.675)
  L3 [Int 1] w0.5: v1(17.775,6.675) 21.875,6.675 24.65,9.45 24.65,14.8 23.975,15.475 v1(23.975,20.05)
  L6 [Bottom Layer] w0.2: 23.975,20.975 24.25,21.25 U1.15
  L6 [Bottom Layer] w0.3: v1(23.975,20.05) 23.975,20.975
UGATE2: U1.26 U3.1 | length 19.2
  L1 [Top Layer] w0.5: U3.1@15.967,41.525 v1(17.375,41.525)
  L4 [Int 2] w0.203: v1(24.25,27.575) 24.25,29.15
  L4 [Int 2] w0.5: v1(17.375,41.525) 23.1,35.8 23.1,30.3 24.25,29.15
  L6 [Bottom Layer] w0.15: U1.26 v1(24.25,27.575)
pads on no net: U1.9

## Polygon pours and split planes (outlines as drawn)
GND on L1 [Top Layer] "L3 [Int 1]-No Net" (solid, pour order 28): 14.7,9.75 17.85,9.75 17.85,7.4 14.7,7.4
GND on L1 [Top Layer] "L3 [Int 1]-No Net" (solid, pour order 26): 14.7,5.225 18,5.225 18,1.6 16.1,1.6 14.7,1.6
GND on L1 [Top Layer] "L3 [Int 1]-No Net" (solid, pour order 24): 42.675,10.6 42.675,12.425 47.475,12.425 47.5,12.4 47.5,1.275 35.65,1.275 35.65,8.875 41.35,8.875 42.675,10.2 42.1,9.575 42.675,10.2
GND on L1 [Top Layer] "L3 [Int 1]-No Net" (solid, pour order 20): 36.15,43.075 36.15,45.65 39.325,45.65 39.775,45.65 39.775,44.475 39.775,43.075
GND on L1 [Top Layer] "L3 [Int 1]-No Net" (solid, pour order 16): 14.375,39.575 16.95,39.575 16.95,36.4 16.95,35.95 15.775,35.95 14.375,35.95
GND on L1 [Top Layer] "L3 [Int 1]-No Net" (solid, pour order 14): 15.25,44.625 17.775,44.625 17.775,42.325 15.25,42.325
+VIN on L1 [Top Layer] "L3 [Int 1]-No Net" (solid, pour order 12): 35.65,22.75 35.65,19.624 14.649,19.624 8.2,13.175 8.2,7.1 13.4,7.1 13.4,0.95 13.35,0.9 7.35,0.9 7.35,22.75 2.025,22.75 2.025,41.8 2,41.825 2.225,42.05 12.75,42.05 12.75,22.775
OUT1 on L1 [Top Layer] "L3 [Int 1]-No Net" (solid, pour order 8): 28.85,12.45 28.85,3.9 34.275,3.9 34.275,7.925 34.55,8.2 35.725,9.375 35.825,9.375 41.025,9.375 41.1,9.375 42.4,10.6 42.4,11.25 42.4,12.525 47.775,17.9 47.775,19.5 47.775,22.725 47.775,23.025 47.475,23.025 45.575,23.025 43.25,23.025 42.5,23.025 39.85,23.025 39.85,22.725 39.85,19.625 39.85,12.475 28.875,12.475
OUT2 on L1 [Top Layer] "L3 [Int 1]-No Net" (solid, pour order 6): 28.9,45.975 28.9,37.3 42.65,37.3 47.55,37.3 47.55,42.275 47.55,42.625 35.15,42.625 35.15,44.825 35.15,45.975 34,45.975
PHASE2 on L1 [Top Layer] "L6 [Bottom Layer]-No Net" (solid, pour order 0): 8.625,47.475 23.725,47.475 23.725,39.775 19,39.775 18.825,39.95 18.55,40.225 18.55,46.125 13,46.125 12.95,46.075 12.075,45.2 12.075,42.327 8.525,42.327 8.525,47.425
PHASE1 on L1 [Top Layer] "L6 [Bottom Layer]-No Net" (solid, pour order 4): 8.8,12.425 8.85,12.475 23.575,12.475 23.575,4.3 23.525,4.35 19.475,4.35 19.475,11.825 19.4,11.9 19.375,11.875 12.525,11.875 12.175,11.525 12.175,7.45 8.8,7.45 8.8,12.425
GND on L6 [Bottom Layer] "L3 [Int 1]-No Net" (solid, pour order 34): 35.35,24.025 32.6,24.025 32.6,22.425 32.575,22.4 32.6,22.425 35.35,22.425
GND on L6 [Bottom Layer] "L3 [Int 1]-No Net" (solid, pour order 32): 34.25,31.65 34.25,28.9 35.85,28.9 35.875,28.875 35.85,28.9 35.85,31.65
GND on L6 [Bottom Layer] "L3 [Int 1]-No Net" (solid, pour order 30): 32.45,34.05 32.45,31.3 34.05,31.3 34.075,31.275 34.05,31.3 34.05,34.05
+5V_VCC on L3 [Int 1] "L3 [Int 1]-No Net" (solid, pour order 36): 10.6,22.35 10.6,35.725 40.9,35.725 40.9,26.975 40.9,13.675 48.3,13.675 10.6,13.675
GND on L5 [GND] (split plane): 49.49,0.51 0.51,0.51 0.51,49.49 49.49,49.49
GND on L2 [GND] (split plane): 49.49,0.51 0.51,0.51 0.51,49.49 49.49,49.49

## Other copper
L1 [Top Layer]:
  text "DAQSys" at 3.7,2.2 h1.52 r90

## Silkscreen, mask and mechanical layers (free items; w line width, h text height)
Top Overlay:
  text "OUT2" at 42.65,42.675 h1.52
  text "1" at 16.1,40.85 h1 r270
  text "+VIN" at 2,32.775 h1.52
  text "GND" at 43.15,25.775 h1.52
  text "OUT1" at 42.5,22.575 h1.52
  text "GND" at 3.075,15.9 h1.52
  text "1" at 16.275,6.025 h1 r270
  text "GND" at 42.925,5.775 h1.52
Bottom Overlay:
  text "ISL6236A Demo Board" at 43.8,46.75 h2
  text "1" at 28.375,27.225 h1
  text "(c) 2016 DAQSys" at 15.05,6.025 h1
Top Solder:
  text "DAQSys" at 3.7,2.2 h1.52 r90
Board Outline:
  lines w0.254: 0,0.05 0,50 50,50 50,0.1 49.95,0.05 0,0.05